# Altium PCB new_topology.PcbDoc
Units mm, origin at the board's own origin, x right, y up, seen from the top; angles counter-clockwise.
Board outline 178.94 x 100.71 mm, 2 copper layers (Top Layer, Bottom Layer); 76 components, 68 nets, 186 pads, 185 vias.
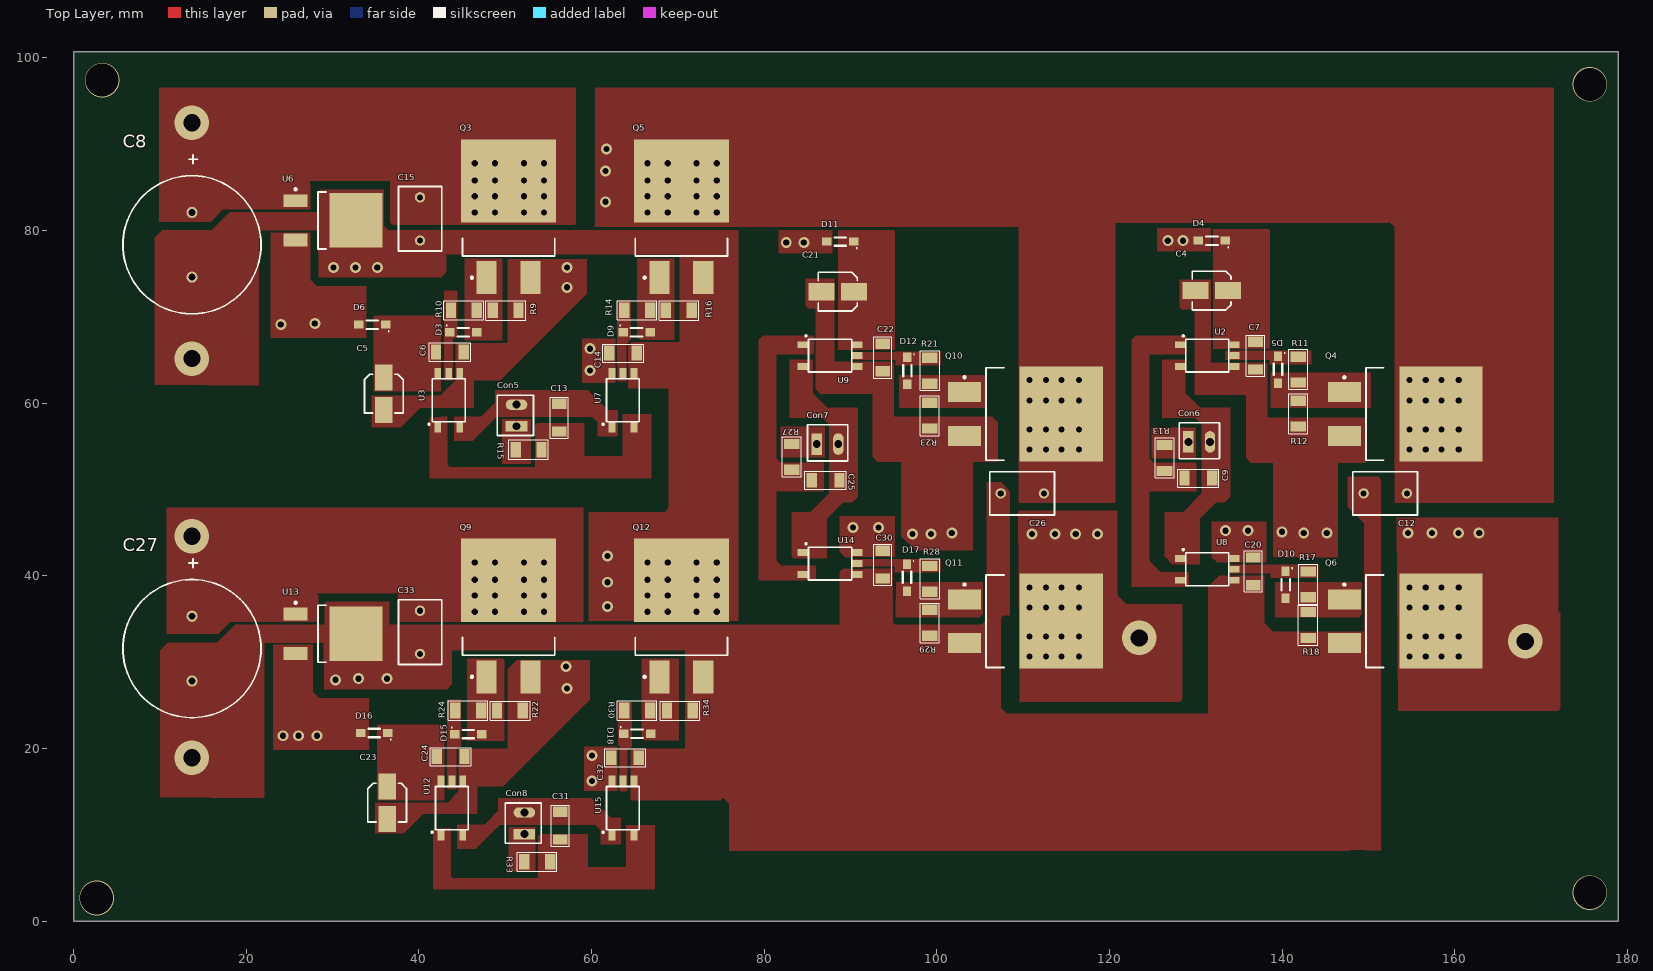
[diagram p0: Top Layer view]
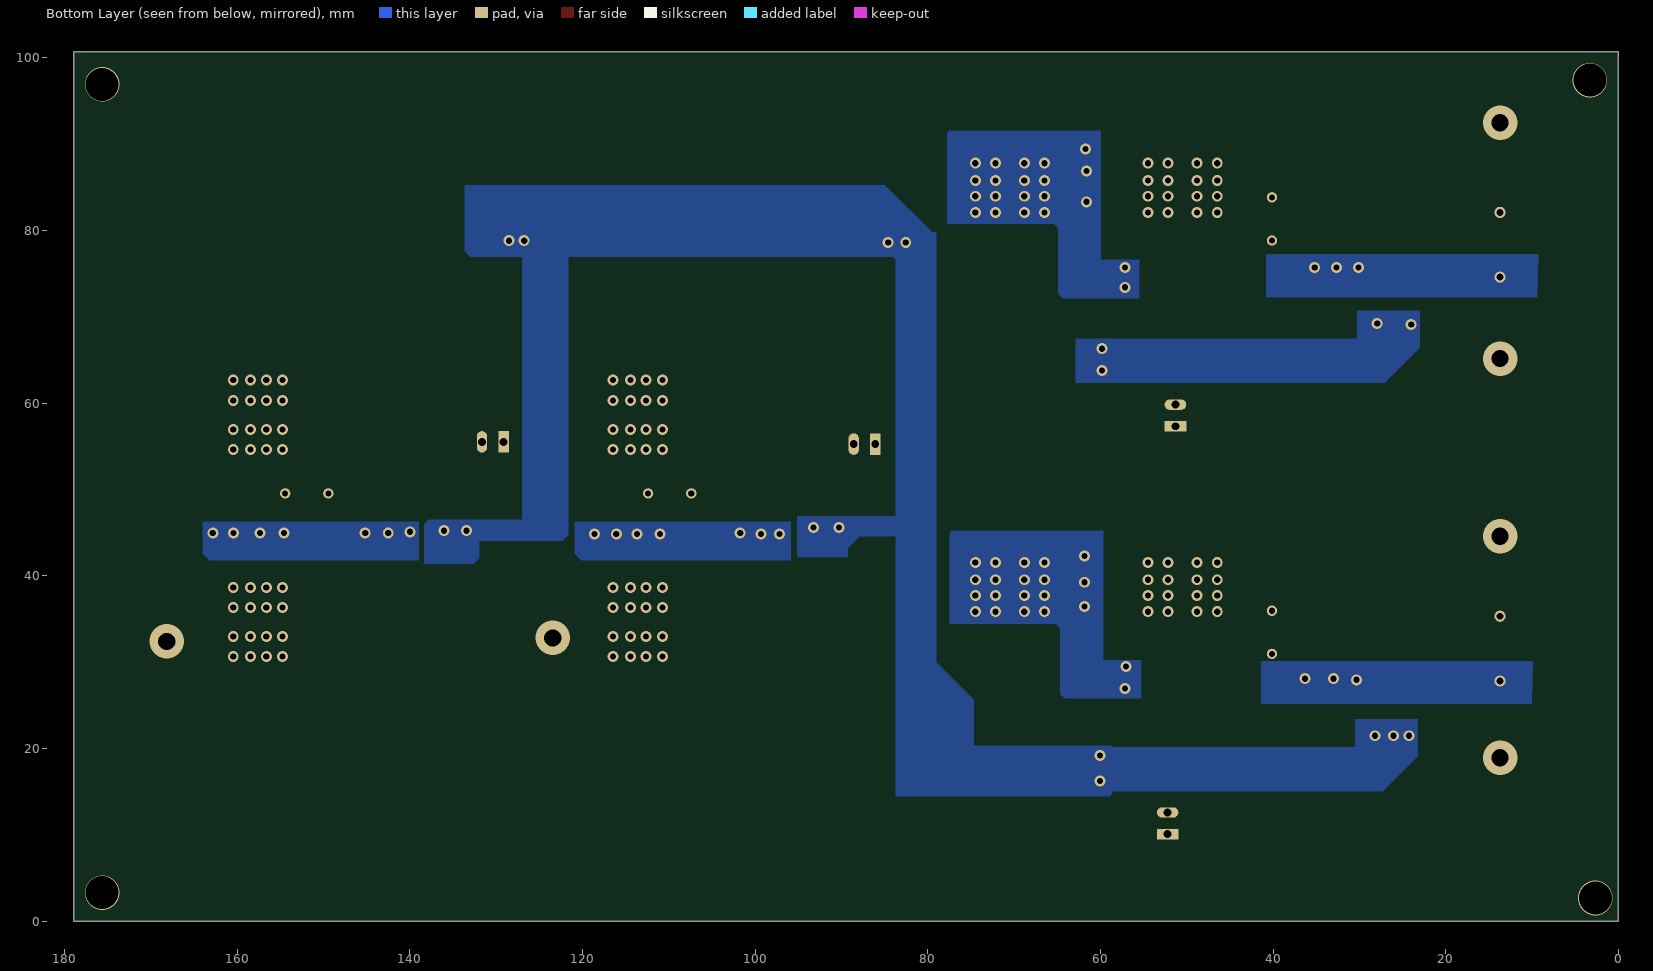
[diagram p1: Bottom Layer view, seen from below]
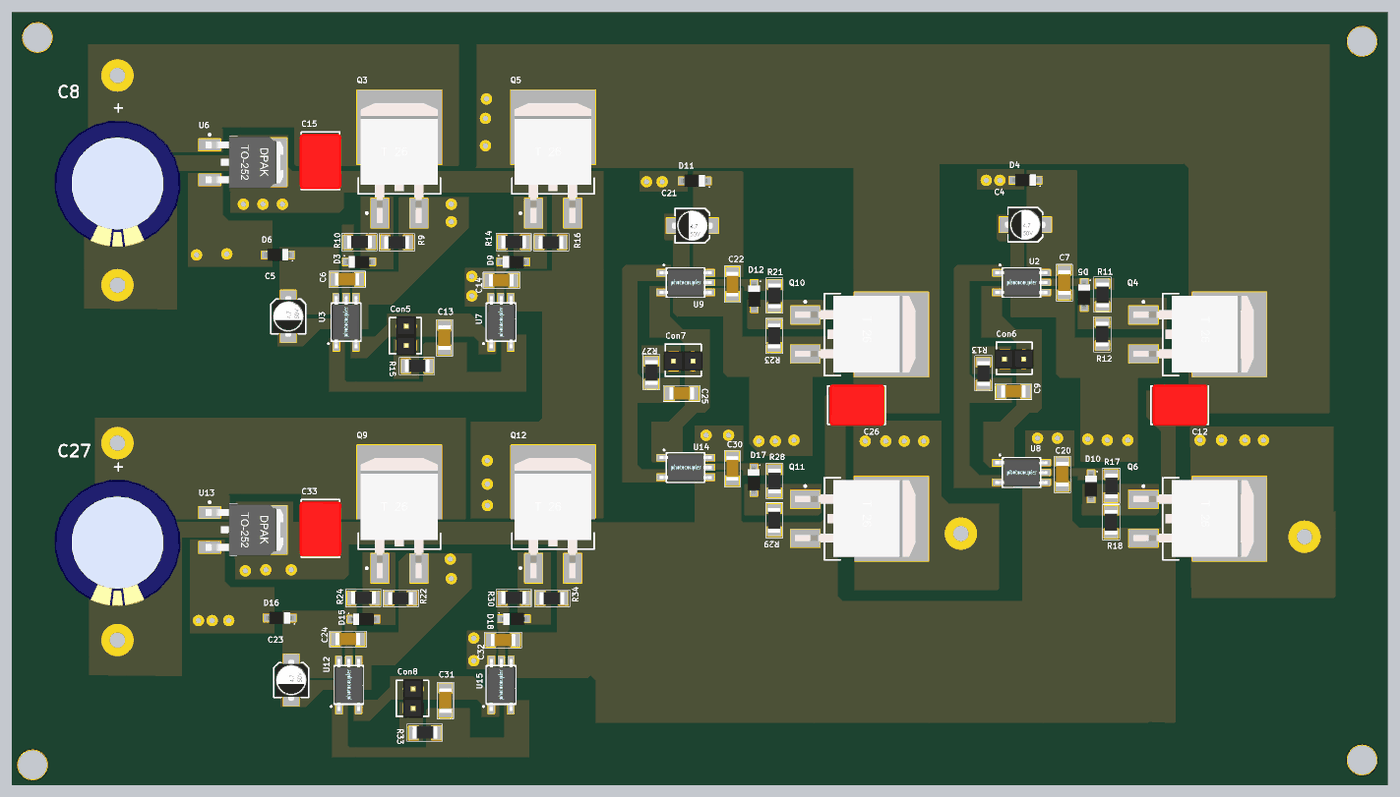
[diagram p2: 3D render of the assembled board from above, using the file's embedded part models]

## Layer stack, top to bottom
Top Solder: solder mask 0.0102, Solder Resist, Dk 3.5
Top Layer: signal copper 0.0356
Dielectric 1: dielectric 0.32, FR-4, Dk 4.8
Bottom Layer: signal copper 0.0356
Bottom Solder: solder mask 0.0102, Solder Resist, Dk 3.5

## Board outline
0,0 0,100.711 178.943,100.711 178.943,0

## Design rules (kind name [scope] priority, off if disabled: settings)
Clearance [All] p1: gap=0.254 ignorepadtopadclearanceinfootprint=FALSE except(0: Arc-Hole Track-Hole SMDPad-Hole THPad-Hole Via-Hole Fill-Hole Poly-Hole Region-Hole Text-Hole)
Height [All] p1: minheight=0 maxheight=76.2 prefheight=12.7
PolygonConnect [All] p1: connectstyle=Direct reliefconductorwidth=0.254 reliefentries=4 polygonreliefangle="90 Angle" airgapwidth=0.254
RoutingVias [All] p1: holewidth=0.711 width=1.27 viastyle="Through Hole" minholewidth=0.711 minwidth=1.27 maxholewidth=2 maxwidth=5
SolderMaskExpansion [All] p1: expansion=0.102
Width [All] p1: maxlimit=0.254 minlimit=0.254 preferedwidth=0.254
29 further rules are at their usual default settings.

## Components (designator, comment, footprint, x,y, rotation, side; value= is the part's Value field where it differs from the comment)
C4 "1uF50v" "4x5.3 cap" 131.826,73.025 r180 top
C5 "1uF50v" "4x5.3 cap" 35.941,61.087 r270 top
C6 "4.7uF" C-1206 43.587,65.913 r180 top
C7 "4.7uF" C-1206 136.906,65.484 r90 top
C8 "4700uF" "63v 2200uF" 13.716,74.577 r90 top
C9 "5.6nF" C-1206 130.287,51.308 r0 top
C12 "470pF" "100v 470pF" 149.432,49.53 r0 top
C13 "5.6nF" C-1206 56.261,58.305 r90 top
C14 "4.7uF" C-1206 63.653,65.786 r180 top
C15 "470pF" "100v 470pF" 40.132,83.82 r270 top
C20 "4.7uF" C-1206 136.652,40.513 r90 top
C21 "1uF50v" "4x5.3 cap" 88.519,72.898 r180 top
C22 "4.7uF" C-1206 93.726,65.278 r90 top
C23 "1uF50v" "4x5.3 cap" 36.322,13.716 r270 top
C24 "4.7uF" C-1206 43.688,19.05 r180 top
C25 "5.6F" C-1206 87.122,51.054 r0 top
C26 "470pF" "100v 470pF" 107.396,49.53 r0 top
C27 "4700uF" "63v 2200uF" 13.716,27.806 r90 top
C30 "4.7uF" C-1206 93.726,41.275 r90 top
C31 "5.6nF" C-1206 56.388,11.049 r90 top
C32 "4.7uF" C-1206 63.881,18.923 r180 top
C33 "470pF" "100v 470pF" 40.132,35.941 r270 top
Con5 "Connector2" Conn 51.308,57.342 r180 top
Con6 "Connector2" Conn 129.159,55.499 r90 top
Con7 "Connector2" Conn 86.106,55.245 r90 top
Con8 "Connector2" Conn 52.221,10.098 r180 top
D3 "B5819W" SOD123 43.649,68.149 r0 top
D4 "B5819W" SOD123 133.35,78.867 r180 top
D5 "B5819W" SOD123 139.446,65.381 r270 top
D6 "B5819W" SOD123 36.083,69.138 r180 top
D9 "B5819W" SOD123 63.715,68.149 r0 top
D10 "B5819W" SOD123 140.335,40.45 r270 top
D11 "B5819W" SOD123 90.312,78.766 r180 top
D12 "B5819W" SOD123 96.52,65.23 r270 top
D15 "B5819W" SOD123 44.22,21.59 r0 top
D16 "B5819W" SOD123 36.322,21.844 r180 top
D17 "B5819W" SOD123 96.47,41.29 r270 top
D18 "B5819W" SOD123 63.778,21.64 r0 top
Q3 "IRF3205" DPAK_TO263 50.396,80.727 r90 top locked
Q4 "IRF3205" DPAK_TO263 153.396,58.727 r0 top locked
Q5 "IRF3205" DPAK_TO263 70.396,80.727 r90 top locked
Q6 "IRF3205" DPAK_TO263 153.396,34.727 r0 top locked
Q9 "IRF3205" DPAK_TO263 50.396,34.481 r90 top locked
Q10 "IRF3205" DPAK_TO263 109.396,58.727 r0 top locked
Q11 "IRF3205" DPAK_TO263 109.396,34.727 r0 top locked
Q12 "IRF3205" DPAK_TO263 70.396,34.481 r90 top
R9 "10k" R-1206 50.038,70.739 r180 top
R10 "10" R-1206 45.212,70.739 r0 top
R11 "10" R-1206 141.859,63.881 r270 top
R12 "10k" R-1206 141.859,58.777 r90 top
R13 "R-1206" R-1206 126.365,53.635 r270 top
R14 "10" R-1206 65.278,70.739 r0 top
R15 "R-1206" R-1206 52.705,54.61 r0 top
R16 "10k" R-1206 70.104,70.739 r180 top
R17 "10" R-1206 143.002,38.989 r270 top
R18 "10k" R-1206 143.002,34.29 r90 top
R21 "10" R-1206 99.187,63.754 r270 top
R22 "10k" R-1206 50.546,24.384 r180 top
R23 "10k" R-1206 99.187,58.547 r90 top
R24 "10" R-1206 45.72,24.384 r0 top
R27 "R-1206" R-1206 83.185,53.762 r270 top
R28 "10" R-1206 99.187,39.624 r270 top
R29 "10k" R-1206 99.187,34.544 r90 top
R30 "10" R-1206 65.278,24.384 r0 top
R33 "R-1206" R-1206 53.721,6.858 r0 top
R34 "10k" R-1206 70.231,24.384 r180 top
U2 "TLP152" TLP152 131.318,65.23 r0 top
U3 "TLP152" TLP152 43.712,60.325 r90 top
U6 "L78M15CDT" TO-252 29.718,81.153 r0 top
U7 "TLP152" TLP152 63.881,60.325 r90 top
U8 "TLP152" TLP152 131.318,40.489 r0 top
U9 "TLP152" TLP152 87.63,65.23 r0 top
U12 "TLP152" TLP152 44.069,13.081 r90 top
U13 "L78M15CDT" TO-252 29.718,33.274 r0 top
U14 "TLP152" TLP152 87.63,41.148 r0 top
U15 "TLP152" TLP152 63.881,13.081 r90 top

## Footprints (in the part's own frame and the unit in brackets; to place one, negate y for a bottom-side part, rotate by r counter-clockwise, add the part's x,y. Pads: shape width x height; smd on the part's side, far side on the other; paste and mask are expansions set on the pad)
"4x5.3 cap" [mm]
  rect 3x2 smd: 1(-1.875,0) 2(1.875,0)
  silkscreen extent -2.25,-2.25 2.25,2.25, body extent -2.63,-2.15 2.67,2.15, height 5.71
"63v 2200uF" [mm]
  round 1.3 hole 0.8: 1(0,0) 2(7.5,0)
  silkscreen extent -4.25,-8 14.16,8, body extent -4.44,-8.25 12.06,8.25, height 26.11
"100v 470pF" [mm]
  round 1.2 hole 0.7: 1(0,0) 2(5,0)
  silkscreen extent -1.27,-2.5 6.22,2.5, body extent -1.06,-2.7 6.14,2.7, height 7
C-1206 [mm]
  rect 1.2x1.7 smd: 1(-1.6,0) 2(1.6,0)
  silkscreen extent -2.4,-1.05 2.37,1.05, body extent -1.6,-0.8 1.6,0.8, height 1
Conn [mm]
  rect 2.5x1.2 hole 0.9: 1(0,0.025)
  oval 2.5x1.2 hole 0.9: 2(0,-2.475)
  silkscreen extent -1.96,-3.57 2.22,1.1, body extent -5,-3.74 1.3,1.34, height 8.15
DPAK_TO263 [mm] "D2-PAK, 3-Pads, Body 7.93x8.70mm (max), IPC Medium Density"
  rect 3.81x2.32 smd: 1(-6.2,2.54) 2(-6.2,-2.54)
  rect 9.65x11 smd: 3(5,0)
  silkscreen extent -6.32,-5.35 -1.62,5.35, body extent -7.51,-4.98 8.16,5.02, height 4.81
R-1206 [mm]
  rect 1.2x1.8 smd: 1(-1.5,0) 2(1.5,0)
  silkscreen extent -2.32,-1.1 2.27,1.12, body extent -1.6,-0.78 1.6,0.83, height 0.56
SOD123 [mm]
  rect 1.1x0.95 smd: a(3.063,0.05) k(-0.062,0.05)
  silkscreen extent -0.46,-0.43 2.15,0.87, body extent -0.38,-0.78 3.32,0.83, height 1.28
TLP152 [mm] "SOTFL, 5-Leads, Body 3.75x7.20mm, Pitch 1.27mm, IPC Medium Density"
  rect 1.2x0.8 smd: 1(-3.15,1.524) 2(-3.15,-1.016) 3(3.15,-1.016) 4(3.15,0.254) 5(3.15,1.524)
  silkscreen extent -2.87,-1.65 2.5,2.61, body extent -3.39,-1.65 3.38,2.15, height 2.11
TO-252 [mm]
  rect 2.8x1.5 smd: 1(-4,2.275) 3(-4,-2.275)
  rect 6.1x6.3 smd: 4(3,0)
  silkscreen extent -4.12,-3.3 -0.45,3.72, body extent -4.52,-3.37 5.58,3.37, height 2.41

## Part data
C4 C5 C21 C23: library part UWD1H100MCL1GS, "Aluminum Electrolytic Capacitors - SMD 50volts 10uF 6.3x5.8", Capacitance=10uF, Case/Package=SMD/SMT, Leakage Current=3uA, Manufacturer=Nichicon, Max Operating Temperature=105°C, Min Operating Temperature=-55°C, Package Quantity=1, Ripple Current=165mA, Supplier Part Number 1=493-6294-2-ND, Tolerance=20%, Voltage=50V, ComponentLink1Description=https://datasheet.ciiva.com/11783/0900766b8080ae55-11783196.pdf?src-supplier=RSComponents, ComponentLink1URL=https://datasheet.ciiva.com/11783/0900766b8080ae55-11783196.pdf?src-supplier=RSComponents, ComponentLink2Description=https://datasheet.ciiva.com/17526/e-wd-17526757.pdf?src-supplier=Avnet+Europe, ComponentLink2URL=https://datasheet.ciiva.com/17526/e-wd-17526757.pdf?src-supplier=Avnet+Europe, ComponentLink3Description=https://datasheet.ciiva.com/5362/e-wd-5362054.pdf?src-supplier=Mouser, ComponentLink3URL=https://datasheet.ciiva.com/5362/e-wd-5362054.pdf?src-supplier=Mouser, ComponentLink4Description=https://datasheet.ciiva.com/11686/e-wd-11686678.pdf?src-supplier=Avnet, ComponentLink4URL=https://datasheet.ciiva.com/11686/e-wd-11686678.pdf?src-supplier=Avnet, ComponentLink5Description=https://datasheet.ciiva.com/6310/e-wd-6310126.pdf?src-supplier=Digi-Key, ComponentLink5URL=https://datasheet.ciiva.com/6310/e-wd-6310126.pdf?src-supplier=Digi-Key, ComponentLink6Description=https://datasheet.ciiva.com/6310/e-wd-6310127.pdf?src-supplier=Digi-Key, ComponentLink6URL=https://datasheet.ciiva.com/6310/e-wd-6310127.pdf?src-supplier=Digi-Key, Diameter=6.3mm, Dissipation Factor=0.12%, Features="General Purpose", Height=5.8mm, Height - Seated (Max)=0.24inch, Impedance=880mR, Lead Free="Lead Free", Lead Pitch=2.2mm, Length=5.8mm, Life (Hours)=2000Hour, Manufacturer Part Number=UWD1H100MCL1GS, Material=Aluminium, Mount="Surface Mount", Packaging="Tape and Reel", Pricing 1="1000 = 0.23520, 2000 = 0.22050, 5000 = 0.20580, 10000 = 0.19845, 25000 = 0.19110, 50000 = 0.19040 (USD)", Radiation Hardening=No, RoHS=Yes, Stock 1=8000, Supplier 1=Digi-Key, Termination=SMD/SMT, Voltage Rating=50V, Voltage Rating (DC)=50V
C6 C7 C9 C13 C14 C20 C22 C24 C25 C30 C31 C32: library part C-1206
C8 C27: library part "Aluminum Electrolytic Capacitors", "PKL5-063V472MM450 Aluminum Electrolytic Capacitors - Snap In 63volts 4700uF 20%", Capacitance=4.7mF, Case/Package=Radial, Manufacturer=Nichicon, Manufacturer Part Number=LKS1J472MESZ, Max Operating Temperature=85°C, Min Operating Temperature=-40°C, Package Quantity=250, Ripple Current=3A, Supplier Part Number 1=647-LKS1J472MESZ, Tolerance=20%, Voltage Rating=63V, ComponentLink2Description=https://www.ozdisan.com/pasif-komponentler/kondansatorler/aluminyum-kondansatorler/PKL5-063V472MM450, ComponentLink2URL=https://www.ozdisan.com/pasif-komponentler/kondansatorler/aluminyum-kondansatorler/PKL5-063V472MM450, Diameter=22mm, Height - Seated (Max)=1.772inch, Lead Pitch=0.394inch, Length=45mm, Life (Hours)=1000Hour, Mount="Through Hole", Packaging=Bulk, RoHS=Yes, Supplier 1=Mouser, Termination="Snap in", Voltage Rating (DC)=63V
C12 C15 C26 C33: library part "100v 470p cap"
D3 D4 D5 D6 D9 D10 D11 D12 D15 D16 D17 D18: library part 1N4148W-E3-18, "Diode Small Signal Switching 100V 0.15A 2-Pin SOD-123 T/R", Average Rectified Current=150mA, Forward Voltage=1.2V, Manufacturer=Vishay, Max Operating Temperature=150°C, Max Power Dissipation=350mW, Max Repetitive Reverse Voltage (Vrrm)=100V, Max Reverse Leakage Current=5uA, Max Reverse Voltage (DC)=75V, Max Surge Current=2A, Min Operating Temperature=-55°C, Package Quantity=10000, Peak Reverse Current=100uA, Supplier Part Number 1=70061597, ComponentLink1Description=https://datasheet.ciiva.com/29885/1n4148w-29885941.pdf?src-supplier=Avnet, ComponentLink1URL=https://datasheet.ciiva.com/29885/1n4148w-29885941.pdf?src-supplier=Avnet, ComponentLink2Description=https://datasheet.ciiva.com/29593/1n4148w-29593113.pdf?src-supplier=Digi-Key, ComponentLink2URL=https://datasheet.ciiva.com/29593/1n4148w-29593113.pdf?src-supplier=Digi-Key, ComponentLink3Description=https://datasheet.ciiva.com/29593/1n4148w-29593111.pdf?src-supplier=Digi-Key, ComponentLink3URL=https://datasheet.ciiva.com/29593/1n4148w-29593111.pdf?src-supplier=Digi-Key, ComponentLink4Description=https://datasheet.ciiva.com/29593/1n4148w-29593112.pdf?src-supplier=Digi-Key, ComponentLink4URL=https://datasheet.ciiva.com/29593/1n4148w-29593112.pdf?src-supplier=Digi-Key, Contact Plating=Tin, Element Configuration=Single, Forward Current=150mA, Height=1.25mm, Lead Free="Lead Free", Length=2.85mm, Manufacturer Part Number=1N4148W-E3-18, Mount="Surface Mount", Number of Pins=2, Packaging="Tape and Reel", Peak Non-Repetitive Surge Current=2A, Power Dissipation=350mW, Pricing 1="1 = 0.03900, 25 = 0.03800, 100 = 0.03600, 250 = 0.03400, 500 = 0.03200, 1000 = 0.03100, 2500 = 0.02900 (USD)", Radiation Hardening=No, Recovery Time=4ns, Reverse Recovery Time=4ns, RoHS=Yes, Stock 1=6838, Supplier 1="Allied Electronics", Weight=0.000363oz, Width=1.7mm
Q3 Q4 Q5 Q6 Q9 Q10 Q11 Q12: library part IRF3205STRLPBF, "MOSFET N-CH 55V 110A D2PAK", Case/Package=D2PAK, Continuous Drain Current (ID)=110A, Drain to Source Breakdown Voltage=55V, Drain to Source Resistance=8mR, Gate to Source Voltage (Vgs)=20V, Input Capacitance=3.247nF, Manufacturer=Infineon, Max Operating Temperature=175°C, Max Power Dissipation=200W, Min Operating Temperature=-55°C, Supplier Part Number 1=IRF3205STRLPBFCT-ND, Threshold Voltage=4V, ComponentLink1Description=https://www.alliedelec.com/m/d/b8827ca43655240244f0cc5c2198e6b1.pdf?src-supplier=Allied+Electronics, ComponentLink1URL=https://www.alliedelec.com/m/d/b8827ca43655240244f0cc5c2198e6b1.pdf?src-supplier=Allied+Electronics, ComponentLink2Description=https://www.infineon.com/dgdl/irf3205spbf.pdf?fileId=5546d462533600a4015355defac9190c&src-supplier=Digi-Key, ComponentLink2URL=https://www.infineon.com/dgdl/irf3205spbf.pdf?fileId=5546d462533600a4015355defac9190c&src-supplier=Digi-Key, ComponentLink3Description=http://www.infineon.com/dgdl/irf3205spbf.pdf?fileId=5546d462533600a4015355defac9190c&src-supplier=Digi-Key, ComponentLink3URL=http://www.infineon.com/dgdl/irf3205spbf.pdf?fileId=5546d462533600a4015355defac9190c&src-supplier=Digi-Key, ComponentLink4Description=http://www.farnell.com/datasheets/1884183.pdf?src-supplier=Element14, ComponentLink4URL=http://www.farnell.com/datasheets/1884183.pdf?src-supplier=Element14, Drain to Source Voltage (Vdss)=55V, Height=0.19inch, Lead Free="Lead Free", Length=0.42inch, Manufacturer Part Number=IRF3205STRLPBF, Mount="Surface Mount", Number of Pins=3, Packaging="Cut Tape", Power Dissipation=200W, Pricing 1="1 = 1,84000, 10 = 1,66600, 100 = 1,33840 (USD)", Rds On Max=8mR, REACH SVHC="No SVHC", RoHS=Yes, Stock 1=3281, Supplier 1=Digi-Key, Turn-Off Delay Time=50ns, Turn-On Delay Time=14ns, Width=0.38inch
R9 R10 R11 R12 R14 R16 R17 R18 R21 R22 R23 R24 R28 R29 R30 R34: library part R-1206, "Res1206"
R13 R15 R27 R33: "Res1206"
U2 U3 U7 U8 U9 U12 U14 U15: library part TLP152(TPL,E, "OPTOISO 3.75KV GATE DRIVER 6SO-5", Case/Package=SO, Forward Current=10mA, Forward Voltage=1.57V, High Level Output Current=2A, Manufacturer=Toshiba, Max Operating Temperature=100°C, Max Output Current=2.5A, Max Power Dissipation=260mW, Min Operating Temperature=-40°C, Package Quantity=3000, Supplier Part Number 1=757-TLP152TPLE, ComponentLink1Description=https://datasheet.ciiva.com/41848/tlp152-datasheet-en-20120914-41848928.pdf?src-supplier=Digi-Key, ComponentLink1URL=https://datasheet.ciiva.com/41848/tlp152-datasheet-en-20120914-41848928.pdf?src-supplier=Digi-Key, Direction=Unidirectional, Fall Time=22ns, Low Level Output Current=2A, Manufacturer Part Number=TLP152(TPL,E, Mount="Surface Mount", Number of Channels=1, Number of Pins=5, Output Current=2.5A, Packaging="Tape and Reel", Pricing 1="1 = 1.55000, 10 = 0.96800, 50 = 0.96800, 100 = 0.87200, 1000 = 0.54300, 10000 = 0.44000 (USD)", Propagation Delay=165ns, Pulse Width Distortion (PWD)=50ns, Rise Time=18ns, RoHS=Yes, Stock 1=22321, Supplier 1=Mouser, Turn-On Delay Time=190ns
U6 U13: "Linear Voltage Regulators 15V 0.5A Positive", Case/Package=DPAK, Dropout Voltage=2V, Manufacturer=STMicroelectronics, Max Input Voltage=35V, Max Operating Temperature=150°C, Max Output Current=500mA, Min Operating Temperature=0°C, Output Voltage=15V, Package Quantity=75, Quiescent Current=6mA, ComponentLink1Description=http://docs-usa.electrocomponents.com/techlib:/itc_doclist_US.htm?stockno=1890999&src-supplier=Allied+Electronics, ComponentLink1URL=http://docs-usa.electrocomponents.com/techlib:/itc_doclist_US.htm?stockno=1890999&src-supplier=Allied+Electronics, ComponentLink2Description=http://www.st.com/web/en/resource/technical/document/datasheet/CD00000447.pdf?src-supplier=Avnet+Europe, ComponentLink2URL=http://www.st.com/web/en/resource/technical/document/datasheet/CD00000447.pdf?src-supplier=Avnet+Europe, ComponentLink3Description=http://www.mouser.com/ds/2/389/stmicroelectronics_cd00000447-329548.pdf?src-supplier=Mouser, ComponentLink3URL=http://www.mouser.com/ds/2/389/stmicroelectronics_cd00000447-329548.pdf?src-supplier=Mouser, Height=2.4mm, Length=6.6mm, Manufacturer Part Number=L78M15CDT, Min Input Voltage=35V, Mount="Surface Mount", Number of Outputs=1, Number of Pins=3, Output Current=500mA, Output Type=Fixed, Packaging=Rail/Tube, Polarity=Positive, Radiation Hardening=No, RoHS=Yes, Supplier 1=Avnet, Supplier Part Number 1=L78M15CDT, Width=6.2mm
Con5 Con6 Con7 Con8: System=Connector

## Via types
v1: diameter 1.27, hole 0.711, Top Layer to Bottom Layer, 175 vias
v2: diameter 4, hole 2, Top Layer to Bottom Layer, 6 vias
v3: diameter 4, hole 3.8, Top Layer to Bottom Layer, 4 vias

## Nets (pads, with @x,y where several pads share a name; then routed paths per layer and width w, separated by ;. In a path a pad name is that pad's centre, name@x,y a point inside that pad or via, vN(x,y) a via of type N, cw(c..) or ccw(c..) an arc to the next point about the centre after c; other vN are vias at no path point)
1: 
15v: C14.2 D6.a U6.3 U7.5
  other v1: 59.817,63.754 59.817,66.294 24.003,69.088 27.94,69.215
15v_1: 
15v_2: C20.2 C30.2 C32.2 D4.a D11.a D16.a U8.5 U13.3 U14.5 U15.5
  other v1: 60.071,16.231 60.071,19.177 24.257,21.463 26.035,21.463 28.194,21.463 133.412,45.212 136.017,45.212 90.297,45.593 93.218,45.593 82.55,78.613 84.582,78.613 126.746,78.803 128.524,78.803
24v_1: C8.2 C15.1 Q3.3 U6.1
  other v1: 46.471,82.077 48.821,82.077 52.171,82.077 54.496,82.077 46.471,83.952 48.821,83.952 52.171,83.952 54.496,83.952 46.471,85.777 48.821,85.777 52.171,85.777 54.496,85.777 46.471,87.777 48.821,87.777 52.171,87.777 54.496,87.777
  other v2: 13.716,92.456
24v_2: C27.2 C33.1 Q9.3 U13.1
  other v1: 46.471,35.831 48.821,35.831 52.171,35.831 54.496,35.831 46.471,37.706 48.821,37.706 52.171,37.706 54.496,37.706 46.471,39.531 48.821,39.531 52.171,39.531 54.496,39.531 46.471,41.531 48.821,41.531 52.171,41.531 54.496,41.531
  other v2: 13.716,44.577
GND_1: C8.1 C14.1 C15.2 C23.2 C24.1 Q5.2 Q9.2 Q12.3 R16.1 R22.1 U6.4 U7.3 U12.3
  other v1: 57.15,26.924 57.023,29.464 66.471,35.831 68.821,35.831 72.171,35.831 74.496,35.831 61.849,36.449 66.471,37.706 68.821,37.706 72.171,37.706 74.496,37.706 61.849,39.243 66.471,39.531 68.821,39.531 72.171,39.531 74.496,39.531 66.471,41.531 68.821,41.531 72.171,41.531 74.496,41.531 61.832,42.291 30.099,75.692 32.639,75.692 35.179,75.692
  other v2: 13.716,65.151
GND_2: C12.1 C20.1 C26.1 C27.1 C30.1 C32.1 C33.2 Q6.2 Q11.2 Q12.2 R18.1 R29.1 R34.1 U8.3 U13.4 U14.3 U15.3
  other v1: 30.353,27.94 33.02,28.067 36.322,28.067
  other v2: 13.716,18.923
H1_1: Con6.1 R13.1
H1_2: Con5.1 R15.1
H2_1: Con7.1 R27.1
H2_2: Con8.1 R33.1
L1_1: C9.2 Con6.2 U2.2 U8.1
L1_2: C13.2 Con5.2 U3.2 U7.1
L2_1: C25.2 Con7.2 U9.2 U14.1
L2_2: C31.2 Con8.2 U12.2 U15.1
NetC2_1: 
NetC3_1: 
NetC4_1: C4.1 C7.2 D4.k U2.5
NetC5_1: C5.1 C6.2 D6.k U3.5
NetC5_2: C5.2 C6.1 C12.2 C26.2 Q3.2 Q4.3 Q5.3 Q10.3 R9.1 U3.3
  other v1: 110.746,54.627 112.621,54.627 114.446,54.627 116.446,54.627 154.746,54.627 156.621,54.627 158.446,54.627 160.446,54.627 110.746,56.952 112.621,56.952 114.446,56.952 116.446,56.952 154.746,56.952 156.621,56.952 158.446,56.952 160.446,56.952 110.746,60.302 112.621,60.302 114.446,60.302 116.446,60.302 154.746,60.302 156.621,60.302 158.446,60.302 160.446,60.302 110.746,62.652 112.621,62.652 114.446,62.652 116.446,62.652 154.746,62.652 156.621,62.652 158.446,62.652 160.446,62.652 57.15,73.406 57.15,75.692 66.471,82.077 68.821,82.077 72.171,82.077 74.496,82.077 61.595,83.312 66.471,83.952 68.821,83.952 72.171,83.952 74.496,83.952 66.471,85.777 68.821,85.777 72.171,85.777 74.496,85.777 61.595,86.868 66.471,87.777 68.821,87.777 72.171,87.777 74.496,87.777 61.722,89.408
NetC9_1: C9.1 R13.2 U2.1 U8.2
NetC13_1: C13.1 R15.2 U3.1 U7.2
NetC16_1: 
NetC17_1: 
NetC21_1: C21.1 C22.2 D11.k U9.5
NetC21_2: C21.2 C22.1 Q10.2 Q11.3 R23.1 U9.3
  other v1: 110.746,30.627 112.621,30.627 114.446,30.627 116.446,30.627 110.746,32.952 112.621,32.952 114.446,32.952 116.446,32.952 110.746,36.302 112.621,36.302 114.446,36.302 116.446,36.302 110.746,38.652 112.621,38.652 114.446,38.652 116.446,38.652 97.155,44.831 99.314,44.831 110.998,44.831 113.665,44.831 116.078,44.831 118.618,44.831 101.727,44.958
  other v2: 123.444,32.79
NetC23_1: C23.1 C24.2 D16.k U12.5
NetC25_1: C25.1 R27.2 U9.1 U14.2
NetC31_1: C31.1 R33.2 U12.1 U15.2
NetC35_1: 
NetC36_1: 
NetC36_2: 
NetC49_1: 
NetC50_1: 
NetD3_a: D3.a Q3.1 R9.2 R10.2
NetD3_k: D3.k R10.1 U3.4
NetD5_a: D5.a Q4.1 R11.2 R12.2
NetD5_k: D5.k R11.1 U2.4
NetD7_a: 
NetD7_k: 
NetD8_a: 
NetD8_k: 
NetD9_a: D9.a Q5.1 R14.2 R16.2
NetD9_k: D9.k R14.1 U7.4
NetD10_a: D10.a Q6.1 R17.2 R18.2
NetD10_k: D10.k R17.1 U8.4
NetD12_a: D12.a Q10.1 R21.2 R23.2
NetD12_k: D12.k R21.1 U9.4
NetD13_a: 
NetD13_k: 
NetD14_a: 
NetD14_k: 
NetD15_a: D15.a Q9.1 R22.2 R24.2
NetD15_k: D15.k R24.1 U12.4
NetD17_a: D17.a Q11.1 R28.2 R29.2
NetD17_k: D17.k R28.1 U14.4
NetD18_a: D18.a Q12.1 R30.2 R34.2
NetD18_k: D18.k R30.1 U15.4
NetD25_a: 
NetD25_k: 
NetD26_a: 
NetD26_k: 
NetD31_a: 
NetD31_k: 
NetD32_a: 
NetD32_k: 
PhaseA: C4.2 C7.1 Q4.2 Q6.3 R12.1 U2.3
  other v1: 154.746,30.627 156.621,30.627 158.446,30.627 160.446,30.627 154.746,32.952 156.621,32.952 158.446,32.952 160.446,32.952 154.746,36.302 156.621,36.302 158.446,36.302 160.446,36.302 154.746,38.652 156.621,38.652 158.446,38.652 160.446,38.652 142.494,44.958 145.161,44.958 154.559,44.958 157.353,44.958 160.401,44.958 162.814,44.958 139.954,45.085
  other v2: 168.148,32.385
copper on no net:
  other v3: 2.667,2.667 175.641,3.302 175.641,96.901 3.302,97.409

## Polygon pours and split planes (outlines as drawn)
PhaseA on Top Layer "Top Layer-PhaseA" (solid, remove dead copper, pour order 128): 153.26,46.736 171.958,46.736 171.958,35.687 172.212,35.687 172.212,24.638 171.958,24.384 153.416,24.384
NetC21_2 on Top Layer "Top Layer-NetC21_2" (solid, remove dead copper, pour order 126): 109.446,47.498 120.904,47.498 120.904,37.719 121.92,36.703 128.397,36.703 128.397,25.654 128.143,25.4 109.601,25.4
H1_1 on Top Layer "Top Layer-H1_1" (solid, remove dead copper, pour order 124): 124.879,57.15 129.959,57.15 129.959,53.594 124.879,53.594
L1_1 on Top Layer "Top Layer-L1_1" (solid, remove dead copper, pour order 122): 126.111,65.029 128.778,65.029 128.778,61.138 130.48,59.436 133.985,59.436 133.985,49.149 133.35,48.514 132.334,48.514 130.429,46.609 130.429,41.352 127.253,41.352 126.365,42.24 126.365,47.371 128.524,47.371 130.683,49.53 130.683,57.561 129.951,58.293 129.697,58.293 126.111,58.293
NetC9_1 on Top Layer "Top Layer-NetC9_1" (solid, remove dead copper, pour order 120): 128.905,67.818 123.037,67.818 122.555,67.336 122.555,38.735 129.159,38.735 129.159,38.989 129.159,39.599 129.159,40.386 125.934,40.386 124.587,41.733 124.587,49.784 129.794,49.784 129.921,49.784 130.048,49.784 130.048,53.086 125.095,53.086 124.587,53.594 124.587,65.659 128.746,65.659 128.905,65.818
L2_1 on Top Layer "Top Layer-L2_1" (solid, remove dead copper, pour order 118): 82.931,65.029 85.598,65.029 85.598,61.138 87.3,59.436 90.805,59.436 90.805,49.149 90.17,48.514 89.154,48.514 87.249,46.609 87.249,42.037 83.388,42.037 83.185,42.24 83.185,47.371 85.344,47.371 87.503,49.53 87.503,57.561 86.771,58.293 86.517,58.293 82.931,58.293
NetC25_1 on Top Layer "Top Layer-NetC25_1" (solid, remove dead copper, pour order 116): 85.725,67.818 79.857,67.818 79.375,67.336 79.375,39.473 86.057,39.473 86.081,39.497 85.979,39.599 85.979,41.148 81.992,41.148 81.407,41.733 81.407,49.784 86.614,49.784 86.741,49.784 86.868,49.784 86.868,53.086 81.915,53.086 81.407,53.594 81.407,65.659 85.566,65.659 85.725,65.818
H2_1 on Top Layer "Top Layer-H2_1" (solid, remove dead copper, pour order 114): 81.915,57.277 86.995,57.277 86.995,53.721 81.915,53.721
15v_2 on Top Layer "Top Layer-15v_2" (solid, remove dead copper, pour order 112): 138.181,46.228 138.176,46.223 138.176,41.529 132.461,41.529 131.826,42.164 131.826,46.228
NetD5_a on Top Layer "Top Layer-NetD5_a" (solid, remove dead copper, pour order 106): 138.684,63.5 150.241,63.5 150.241,59.436 138.684,59.436
NetD5_k on Top Layer "Top Layer-NetD5_k" (solid, remove dead copper, pour order 104): 143.383,64.516 138.562,64.516 138.562,65.024 133.395,65.024 133.387,66.04 143.383,66.04
NetC4_1 on Top Layer "Top Layer-NetC4_1" (solid, remove dead copper, pour order 102): 138.43,80.137 138.562,80.005 138.562,66.294 135.636,66.294 132.015,66.294 132.015,80.137
PhaseA on Top Layer "Top Layer-PhaseA 1" (solid, remove dead copper, pour order 100): 138.956,53.086 138.956,42.258 138.938,42.24 139.065,42.113 146.431,42.113 146.431,53.086 149.694,53.086 149.694,58.293 138.264,58.293 138.264,64.587 138.32,64.643 131.699,64.643 131.699,74.295 128.104,74.295 128.104,71.12 128.358,70.866 129.882,70.866 129.882,60.833 130.009,60.96 135.81,60.96 135.81,53.635 136.359,53.086
NetD10_k on Top Layer "Top Layer-NetD10_k" (solid, remove dead copper, pour order 98): 144.145,39.624 144.018,39.751 138.684,39.751 138.684,40.259 133.776,40.259 133.768,41.275 144.145,41.275
NetD10_a on Top Layer "Top Layer-NetD10_a" (solid, remove dead copper, pour order 96): 139.21,39.243 149.225,39.243 149.225,35.56 148.844,35.179 139.192,35.179
NetD17_a on Top Layer "Top Layer-NetD17_a" (solid, remove dead copper, pour order 94): 95.268,39.243 105.283,39.243 105.283,35.56 104.902,35.179 95.25,35.179
NetD12_k on Top Layer "Top Layer-NetD12_k" (solid, remove dead copper, pour order 92): 100.457,64.262 100.33,64.389 94.996,64.389 94.996,64.897 90.088,64.897 90.08,65.913 100.457,65.913
NetD12_a on Top Layer "Top Layer-NetD12_a" (solid, remove dead copper, pour order 90): 95.631,63.246 105.41,63.246 105.537,63.119 105.537,59.436 95.758,59.436 95.631,59.563
NetC21_2 on Top Layer "Top Layer-NetC21_2 1" (solid, remove dead copper, pour order 88): 95.885,53.213 95.885,44.577 97.536,42.926 104.14,42.926 104.14,53.213 107.061,53.213 107.061,57.785 106.426,58.42 94.996,58.42 94.996,64.714 95.052,64.77 88.138,64.77 88.138,74.422 84.836,74.422 84.836,71.247 85.09,70.993 85.979,70.993 85.979,61.595 86.614,60.96 86.741,61.087 92.542,61.087 92.542,53.762 93.091,53.213
NetC21_1 on Top Layer "Top Layer-NetC21_1" (solid, remove dead copper, pour order 86): 94.996,80.01 95.128,79.878 95.128,66.167 92.202,66.167 88.581,66.167 88.581,80.01
15v_2 on Top Layer "Top Layer-15v_2 1" (solid, remove dead copper, pour order 84): 81.661,80.01 87.884,80.01 87.884,77.343 81.661,77.343
15v_2 on Top Layer "Top Layer-15v_2 2" (solid, remove dead copper, pour order 82): 125.539,80.264 131.699,80.264 131.699,77.597 125.539,77.597
15v_2 on Top Layer "Top Layer-15v_2 3" (solid, remove dead copper, pour order 80): 95.128,46.863 95.123,46.858 95.123,42.164 89.408,42.164 88.773,42.799 88.773,46.863
NetD17_k on Top Layer "Top Layer-NetD17_k" (solid, remove dead copper, pour order 76): 100.457,40.259 100.33,40.386 94.996,40.386 94.996,40.894 90.088,40.894 90.08,41.91 100.457,41.91
NetC5_2 on Top Layer "Top Layer-NetC5_2" (solid, remove dead copper, pour order 74): 77.47,80.391 109.474,80.391 109.474,48.45 120.65,48.45 120.65,80.899 152.273,80.899 152.4,81.026 153.035,80.391 153.035,48.45 163.639,48.45 168.529,48.45 171.45,48.45 171.45,96.52 79.502,96.52 77.47,96.52
H2_2 on Top Layer "Top Layer-H2_2" (solid, remove dead copper, pour order 72): 50.419,10.858 53.467,10.858 53.467,5.715 50.419,5.715
NetC31_1 on Top Layer "Top Layer-NetC31_1" (solid, remove dead copper, pour order 70): 53.848,4.953 53.848,9.805 54.102,10.059 59.563,10.059 59.563,6.223 64.008,6.223 64.008,11.102 67.31,11.102 67.31,3.683 41.656,3.683 41.656,10.68 43.688,10.826 43.688,5.207 43.942,4.953
L2_2 on Top Layer "Top Layer-L2_2" (solid, remove dead copper, pour order 68): 44.45,11.176 47.601,11.176 49.202,12.777 49.202,14.224 59.944,14.224 62.23,11.938 63.392,11.938 63.392,8.943 63.339,8.89 61.087,8.89 61.087,10.541 60.452,11.176 49.392,11.176 46.598,8.382 44.45,8.382
NetD18_k on Top Layer "Top Layer-NetD18_k" (solid, remove dead copper, pour order 64): 64.77,25.4 64.643,25.273 64.643,19.939 64.135,19.939 64.135,15.031 63.119,15.023 63.119,25.4
NetD18_a on Top Layer "Top Layer-NetD18_a" (solid, remove dead copper, pour order 62): 65.786,30.353 70.104,30.353 70.104,20.955 66.167,20.955 65.786,21.336
15v_2 on Top Layer "Top Layer-15v_2 4" (solid, remove dead copper, pour order 60): 59.182,20.193 62.992,20.193 62.992,15.113 59.182,15.113
NetD15_a on Top Layer "Top Layer-NetD15_a" (solid, remove dead copper, pour order 54): 45.593,30.353 49.784,30.353 49.911,30.226 49.911,20.891 45.593,20.891
GND_1 on Top Layer "Top Layer-GND_1" (solid, remove dead copper, pour order 52): 46.736,15.631 46.736,12.446 43.458,12.446 40.513,12.446 38.252,10.185 34.925,10.185 34.925,13.716 43.353,13.716 44.64,15.007 44.64,19.939 50.292,19.939 50.292,29.169 51.349,30.226 59.817,30.226 59.817,25.654 49.794,15.631
NetD15_k on Top Layer "Top Layer-NetD15_k" (solid, remove dead copper, pour order 50): 44.958,25.654 44.831,25.527 44.831,20.193 44.323,20.193 44.323,15.285 43.307,15.277 43.307,25.654
NetC23_1 on Top Layer "Top Layer-NetC23_1" (solid, remove dead copper, pour order 48): 42.926,22.733 42.926,13.97 35.179,13.97 35.179,22.733
15v_2 on Top Layer "Top Layer-15v_2 5" (solid, remove dead copper, pour order 46): 23.114,32.004 23.114,19.812 34.163,19.812 34.163,25.781 28.448,25.781 27.686,26.543 27.686,32.004
GND_2 on Top Layer "Top Layer-GND_2" (solid, remove dead copper, pour order 44): 149.479,33.528 149.479,46.101 147.574,48.006 147.574,51.435 151.13,51.435 151.384,51.181 151.384,8.128 147.955,8.255 147.828,8.128 75.946,8.128 75.946,13.589 75.248,14.287 74.93,13.97 64.516,13.97 64.516,19.685 64.77,19.939 70.866,19.939 70.866,31.369 43.815,31.369 43.815,27.432 43.208,26.825 29.019,26.825 29.019,29.4 29.083,29.464 28.956,29.591 28.956,32.258 22.098,32.258 22.098,14.224 10.033,14.351 10.033,31.369 10.922,32.258 16.637,32.258 18.704,34.325 29.083,34.325 29.083,36.83 29.21,36.957 36.576,36.957 36.576,34.325 75.946,34.325 75.981,34.29 88.773,34.29 88.773,40.462 89.14,40.829 94.869,40.829 94.869,34.544 95.123,34.29 105.156,34.29 105.791,34.798 105.791,50.8 107.442,50.8 108.458,49.784 108.458,35.433 107.696,35.433 107.396,35.133 107.396,24.684 108.077,24.003 131.445,24.003 131.445,38.735 132.715,40.005 137.922,40.005 137.922,34.544 138.938,33.528
24v_2 on Top Layer "Top Layer-24v_2" (solid, remove dead copper, pour order 42): 10.795,47.879 10.795,33.274 16.764,33.274 18.161,34.671 28.321,34.671 28.321,37.719 28.194,37.846 28.321,37.973 37.592,37.973 37.592,34.671 59.055,34.671 59.055,47.879
NetC13_1 on Top Layer "Top Layer-NetC13_1" (solid, remove dead copper, pour order 38): 53.467,52.578 53.467,57.43 53.721,57.684 59.182,57.684 59.182,53.848 63.627,53.848 63.627,58.727 66.929,58.727 66.929,51.308 41.275,51.308 41.275,58.305 43.307,58.451 43.307,52.832 43.561,52.578
H1_2 on Top Layer "Top Layer-H1_2" (solid, remove dead copper, pour order 36): 49.657,58.102 52.936,58.102 52.936,52.959 49.657,52.959
L1_2 on Top Layer "Top Layer-L1_2" (solid, remove dead copper, pour order 34): 44.069,58.42 47.22,58.42 48.821,60.021 48.821,61.468 59.563,61.468 61.849,59.182 63.011,59.182 63.011,56.187 62.958,56.134 60.706,56.134 60.706,57.785 60.071,58.42 49.011,58.42 46.217,55.626 44.069,55.626
15v on Top Layer "Top Layer-15v" (solid, remove dead copper, pour order 26): 58.928,67.437 62.865,67.437 62.865,62.357 58.928,62.357
NetD9_k on Top Layer "Top Layer-NetD9_k" (solid, remove dead copper, pour order 22): 62.992,71.914 64.484,71.914 64.516,71.882 64.516,67.336 64.008,66.828 64.008,62.513 62.992,62.513
NetD9_a on Top Layer "Top Layer-NetD9_a" (solid, remove dead copper, pour order 20): 65.278,76.708 69.596,76.708 69.596,67.31 65.659,67.31 65.278,67.691
NetC5_2 on Top Layer "Top Layer-NetC5_2 1" (solid, remove dead copper, pour order 16): 77.597,96.52 78.613,95.504 78.613,80.391 60.198,80.391 60.452,80.645 60.452,96.52
15v on Top Layer "Top Layer-15v 1" (solid, remove dead copper, pour order 12): 22.86,79.756 22.86,67.564 33.909,67.564 33.909,73.533 28.194,73.533 27.432,74.295 27.432,79.756
NetC5_1 on Top Layer "Top Layer-NetC5_1" (solid, remove dead copper, pour order 10): 42.545,70.104 42.545,61.341 34.798,61.341 34.798,70.104
NetC5_2 on Top Layer "Top Layer-NetC5_2 2" (solid, remove dead copper, pour order 8): 46.355,62.621 46.355,59.436 43.077,59.436 40.132,59.436 37.871,57.175 34.544,57.175 34.544,60.833 42.477,60.833 44.259,62.621 44.259,66.929 50.292,66.929 50.292,76.54 50.396,76.644 59.436,76.644 59.436,72.644 49.413,62.621
NetD3_k on Top Layer "Top Layer-NetD3_k" (solid, remove dead copper, pour order 6): 44.577,73.025 44.45,72.898 44.45,67.564 43.942,67.564 43.942,62.656 42.926,62.648 42.926,73.025
NetD3_a on Top Layer "Top Layer-NetD3_a" (solid, remove dead copper, pour order 4): 45.339,76.708 49.53,76.708 49.657,76.581 49.657,67.246 45.339,67.246
GND_1 on Top Layer "Top Layer-GND_1 1" (solid, remove dead copper, pour order 2): 76.962,61.087 76.962,34.798 59.69,34.798 59.69,47.371 68.453,47.371 68.961,47.879 68.961,61.722 64.262,61.722 64.262,66.675 64.643,67.056 70.231,67.056 70.231,77.216 43.18,77.216 43.18,75.184 42.573,74.577 28.384,74.577 28.384,77.153 28.448,77.216 28.321,77.343 28.321,80.01 21.463,80.01 21.463,61.976 9.398,62.103 9.398,79.121 10.287,80.01 16.002,80.01 18.069,82.077 28.448,82.077 28.448,84.582 28.575,84.709 35.941,84.709 35.941,80.518 36.449,80.01 76.962,80.01
24v_1 on Top Layer "Top Layer-24v_1" (solid, remove dead copper, pour order 0): 9.906,96.52 9.906,81.026 15.875,81.026 17.272,82.423 27.432,82.423 27.432,85.471 27.305,85.598 27.432,85.725 36.703,85.725 36.703,80.899 36.957,80.645 58.039,80.645 58.166,80.772 58.166,96.52
PhaseA on Bottom Layer "Bottom Layer-PhaseA" (solid, remove dead copper, pour order 132): 138.938,46.228 163.957,46.228 163.957,42.545 163.195,41.783 138.938,41.783
NetC21_2 on Bottom Layer "Bottom Layer-NetC21_2" (solid, remove dead copper, pour order 130): 95.885,46.228 120.904,46.228 120.904,42.545 120.142,41.783 95.885,41.783
15v_2 on Bottom Layer "Bottom Layer-15v_2" (solid, remove dead copper, pour order 110): 121.666,80.744 121.666,44.704 122.301,44.069 131.953,44.069 131.953,42.037 132.588,41.402 138.303,41.402 138.303,45.974 137.795,46.482 127,46.482 127,78.549 124.71,80.84
no net on Bottom Layer "Bottom Layer-No Net" (solid, remove dead copper, pour order 108): 122.047,76.962
15v_2 on Bottom Layer "Bottom Layer-15v_2 1" (solid, remove dead copper, pour order 78): 79.502,79.756 84.963,85.217 133.604,85.217 133.604,77.597 132.969,76.962 88.773,76.962 88.773,81.28 88.773,76.962 84.074,76.962 83.693,76.581 83.693,46.863 95.123,46.863 95.123,42.291 94.996,42.164 89.281,42.164 89.281,43.18 87.884,44.577 83.693,44.577 83.693,14.478 58.928,14.478 58.674,14.732 58.674,20.193 58.801,20.32 74.676,20.32 74.676,25.654 78.994,29.972 78.994,79.756
GND_1 on Bottom Layer "Bottom Layer-GND_1" (solid, remove dead copper, pour order 66): 55.245,30.226 59.69,30.226 59.69,45.212 77.216,45.212 77.47,44.958 77.47,34.417 65.151,34.417 64.643,33.909 64.643,26.289 64.135,25.781 55.245,25.781
15v_2 on Bottom Layer "Bottom Layer-15v_2 2" (solid, remove dead copper, pour order 58): 23.241,23.368 23.241,19.1 27.305,15.036 63.119,15.036 63.119,20.116 30.48,20.116 30.48,23.368
GND_2 on Bottom Layer "Bottom Layer-GND_2" (solid, remove dead copper, pour order 56): 9.906,30.099 41.402,30.099 41.402,25.146 10.033,25.146
15v on Bottom Layer "Bottom Layer-15v" (solid, remove dead copper, pour order 24): 22.987,70.689 22.987,66.421 27.051,62.357 62.865,62.357 62.865,67.437 30.226,67.437 30.226,70.689
NetC5_2 on Bottom Layer "Bottom Layer-NetC5_2" (solid, remove dead copper, pour order 18): 55.499,76.581 59.944,76.581 59.944,91.567 77.47,91.567 77.724,91.313 77.724,80.772 65.405,80.772 64.897,80.264 64.897,72.644 64.389,72.136 55.499,72.136
GND_1 on Bottom Layer "Bottom Layer-GND_1 1" (solid, remove dead copper, pour order 14): 9.271,77.216 40.767,77.216 40.767,72.263 9.398,72.263

## Silkscreen, mask and mechanical layers (free items; w line width, h text height)
Mechanical 1:
  the board outline again, w0.254